# Altium PCB 400ETBV4.PcbDoc (part 2 of 2)
Units mm, origin at the board's own origin, x right, y up, seen from the top; angles counter-clockwise.
Board outline 52.77 x 58.36 mm, 2 copper layers (Top Layer, Bottom Layer), stack 1.651 mm thick; 65 components, 61 nets, 261 pads, 245 vias.
Unrouted connection lines stored in the file: 16.
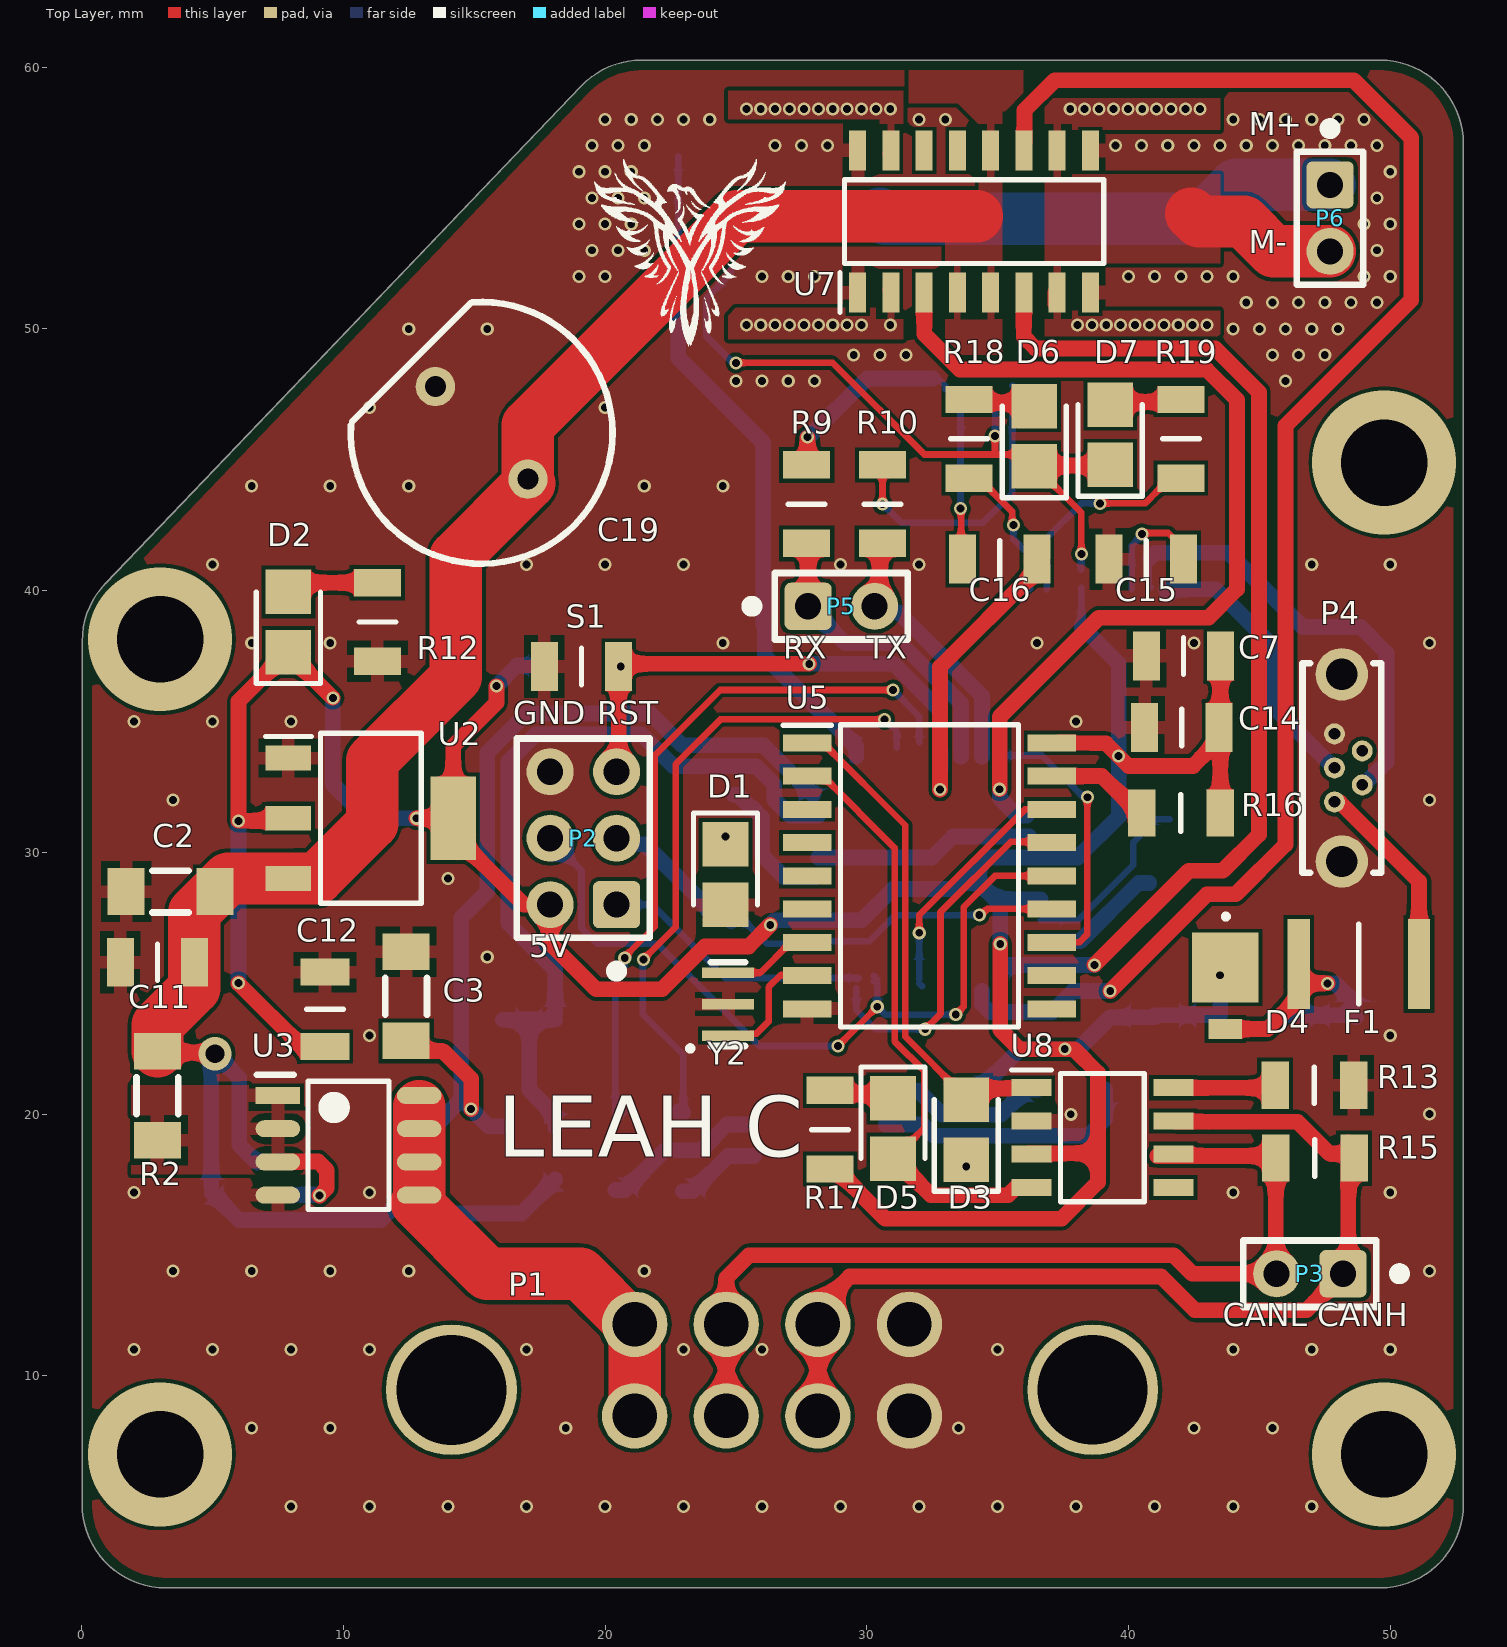
[diagram p0: Top Layer view]

## Via types
v1: diameter 0.5, hole 0.3, Top Layer to Bottom Layer, tented both sides, 240 vias
v2: diameter 5.5, hole 3.3, Top Layer to Bottom Layer, 4 vias
v3: diameter 1.27, hole 0.711, Top Layer to Bottom Layer, tented both sides, 1 vias

## Nets (pads, with @x,y where several pads share a name; then routed paths per layer and width w, separated by ;. In a path a pad name is that pad's centre, name@x,y a point inside that pad or via, vN(x,y) a via of type N, cw(c..) or ccw(c..) an arc to the next point about the centre after c; other vN are vias at no path point) (continued)
NetD5_2: (continued)
  Top Layer w0.6: D5.2@31.225,18.3 31.225,18.127 32.452,16.9 35.4,16.9 U8.4@35.7,17.2 ; U8.4@35.856,17.2 U8.4@36.1,17.2
NetD6_2: D6.2 R18.2 | length 2.7
  Top Layer w0.6: R18.2 34.025,47.175 36.375,47.175 D6.2@36.5,47.3
NetD7_2: D7.2 R19.2 | length 2.7
  Top Layer w0.6: D7.2 39.4,47.2 R19.2@42,47.2
NetF1_2: F1.2 P4.1 | length 7.6
  Top Layer w0.6: P4.1@47.904,31.902 48.082,31.902 51.1,28.885 F1.2
NetR2_1: R2.1 U1.1 U3.1 U3.2 U3.3 | length 4.1
  Top Layer w0.6: U3.3 7.516,18.186 9.042,18.186 9.373,17.856 9.373,17.17 v1(9.093,16.891)
  Bottom Layer w0.6: U1.1@8.077,16.891 8.102,16.916 9.068,16.916 v1(9.093,16.891)
NetR6_1: R6.1 U4.7 | length 6
  Bottom Layer w0.6: R6.1 20.775,17.1 22.293,18.618 23.675,18.618 24.657,19.6 U4.7@25.4,19.6
NetR7_1: R7.1 U4.6 | length 3.3
  Bottom Layer w0.6: R7.1 23.35,17.05 24.7,18.4 U4.6@25.7,18.4
NetR13_2: R13.2 U8.8 | length 3.8
  Top Layer w0.6: U8.8@41.9,21 45.695,21 R13.2@45.7,21.005
NetR16_1: R16.1 U5.17 | length 3.5
  Top Layer w0.6: U5.17@37.51,32.91 37.518,32.918 38.982,32.918 40.3,31.6 R16.1@40.5,31.6
NetR18_1: R18.1 U9.23 | length 5.4
  Top Layer w0.254: R18.1 34.275,44.3 35.553,43.022 35.553,42.547 v1(35.6,42.5)
  Bottom Layer w0.254: v1(35.6,42.5) 35.6,41.972 36.246,41.326 36.246,40.071 U9.23
NetR19_1: R19.1 U9.22 | length 7.7
  Top Layer w0.254: v1(38.913,43.332) 40.632,43.332 40.8,43.5 ; 40.852,43.527 40.852,43.552 41.6,44.3 R19.1@41.7,44.3
  Bottom Layer w0.254: U9.22 36.875,42.006 38.202,43.332 v1(38.913,43.332)
NetU5_7: U5.7 Y2.3 | length 3.4
  Top Layer w0.254: Y2.3 25.933,25.4 27.033,26.5 U5.7@27.6,26.5
NetU5_8: U5.8 Y2.1 | length 4.3
  Top Layer w0.254: Y2.1 25.5,23 25.573,23.073 25.791,23.073 26.25,23.532 26.25,24.85 26.7,25.3 U5.8@27.2,25.3
  Top Layer w0.6: U5.8@27.2,25.3 U5.8@27.3,25.3
NetU6_7: U6.7 Y1.1 | length 7
  Bottom Layer w0.254: U6.7 36.657,27.407 38.075,27.407 40.183,29.515 40.183,30.378 41.072,31.267 Y1.1@41.58,31.267
NetU6_8: U6.8 Y1.3 | length 5.1
  Bottom Layer w0.6: U6.8 38.157,26.6 40.386,28.829 Y1.3@40.792,28.829
OUT_A: P6.1 U7.2 U7.15 | length 18
  Top Layer w0.6: U7.2@30.9,51.5 30.925,51.525 U7.2 ; U7.15@30.9,56.7 U7.15@30.925,56.675
  Bottom Layer w2: 30.5,54.4 30.7,54.2 42.8,54.2 44.1,55.5 P6.1
  other v1: 25.4,50.15 25.95,50.15 26.5,50.15 27.05,50.15 27.6,50.15 28.15,50.15 28.7,50.15 29.25,50.15 29.8,50.15 30.9,50.15 25.4,58.4 25.95,58.4 26.5,58.4 27.05,58.4 27.6,58.4 28.15,58.4 28.7,58.4 29.25,58.4 29.8,58.4 30.35,58.4 30.9,58.4
OUT_B: P6.2 U7.7 U7.10 | length 6.4
  Top Layer w0.6: U7.7@37.2,50.938 U7.7@37.2,51.4
  Top Layer w2: 42.4,54.4 42.7,54.1 44.4,54.1 45.54,52.96 P6.2
  other v1: 38.05,50.15 38.6,50.15 39.15,50.15 39.7,50.15 40.25,50.15 40.8,50.15 41.35,50.15 41.9,50.15 42.45,50.15 43,50.15 37.775,58.4 38.325,58.4 38.875,58.4 39.425,58.4 39.975,58.4 40.525,58.4 41.075,58.4 41.625,58.4 42.175,58.4 42.725,58.4
RESET: C16.2 P2.3 R8.2 S1.1 U6.29 | length 30.9
  Top Layer w0.6: P2.3@20.3,33.3 20.369,33.3 P2.3@20.52,33.451 ; P2.3 20.52,33.16 P2.3@20.52,33.451 ; S1.1 S1.1@20.52,37.02 ; v1(27.8,37.2) 20.7,37.2 S1.1@20.52,37.02 ; v1(32.8,32.4) 32.8,37.08 36.4,40.68 C16.2@36.4,41.2 ; P2.3@20.52,33.451 S1.1@20.52,37.02
  Bottom Layer w0.6: v1(20.6,37.1) R8.2@20.7,37.2 ; v1(27.8,37.2) 30.586,37.2 31.024,37.2 32.8,35.424 U6.29@32.8,33.869 ; v1(32.8,32.4) U6.29@32.817,33.858
RXD: R9.2 U9.1 | length 8
  Top Layer w0.6: R9.2 28.075,44.8 27.737,45.138 v1@27.737,45.837
  Bottom Layer w0.254: 32.525,48.1 32.725,48.1 33,47.825 U9.1@33,47.7
  Bottom Layer w0.6: v1(27.737,45.872) 27.788,45.872 30.015,48.1 32.525,48.1
TXD: R10.2 U9.5 | length 10.5
  Top Layer w0.254: v1(30.6,43.3) R10.2
  Bottom Layer w0.254: v1@30.757,43.157 31.318,42.596 34.442,42.596 35.56,43.713 35.56,47.135 U9.5 ; U9.5@35.569,47.831 U9.5@35.6,47.8
USBD+: P4.3 U9.15 | length 11
  Bottom Layer w0.254: U9.15@41.425,39.652 U9.15
  Bottom Layer w0.6: U9.15 43.338,40.05 45.593,37.795 45.593,35.484 47.814,33.263 47.843,33.263 P4.3@47.879,33.299
USBD-: P4.2 U9.16 | length 17.3
  Bottom Layer w0.254: 40.775,41.175 U9.16 U9.16@40.848,40.123
  Bottom Layer w0.6: 40.834,41.266 41.018,41.45 43.815,41.45 46.657,38.608 48.87,38.608 49.86,37.617 49.86,33.452 49.447,33.038 ; P4.2@48.971,32.588 48.997,32.588 49.447,33.038
VBATT: P1.1 P1.5 U3.5 U3.6 U3.7 U3.8 | length 17.2
  Top Layer w2: U3.5@12.8,16.6 15.5,13.9 19.061,13.9 20.996,11.965 P1.1 P1.5 ; U3.5 U3.6 U3.7 12.9,20.3
VUSB: C17.2 C18.2 D4.1 F1.1 | length 9.5
  Top Layer w0.6: D4.1@43.749,23.2 D4.1 45.309,23.249 46.5,24.44 F1.1@46.5,24.8 ; F1.1@46.6,25 v1@47.6,25
  Bottom Layer w0.6: C17.2 45.99,23.774 48.174,23.774 C18.2@48.18,23.78 ; v1(47.6,24.994) 47.904,24.994 48.649,24.249 C18.2@48.18,23.78 ; C18.2@48.7,23.7 48.62,23.78 C18.2 C18.2@48.18,23.78
pads on no net: P1.24 P4.4 U1.7 U4.3 U4.5 U4.8 U5.3 U5.4 U5.5 U5.6 U5.10 U5.11 U7.13 U7.14 U8.5 U9.3 U9.6 U9.8 U9.9 U9.10 U9.11 U9.12 U9.13 U9.14 U9.19 U9.24 U9.27 U9.28
copper on no net:
  other v2: 3,7 49.77,7 3,38.14 49.77,44.89

## Polygon pours and split planes (outlines as drawn)
GND on Top Layer "GND_L01_P066" (solid, pour order 66): 3.205,1.9 cw(c3.205,5.08) 0.025,5.08 0.025,38.066 cw(c3.205,38.066) 0.907,40.264 19.093,59.281 cw(c21.391,57.083) 21.391,60.263 49.616,60.263 cw(c49.616,57.083) 52.796,57.083 52.796,5.08 cw(c49.616,5.08) 49.616,1.9
OUT_A on Top Layer "Top Layer-OUT_A" (solid, pour order 54): 30.6,52.2 31.4,52.2 31.4,49.6 24.7,49.6 24.7,50.5 25,50.8 30.6,50.8
OUT_A on Top Layer "Top Layer-OUT_A 1" (solid, pour order 52): 24.7,59.1 31.4,59.1 31.4,56 30.5,56 30.5,58 24.7,58
+12V on Top Layer "Top Layer-+12V" (solid, pour order 51): 31.6,60.012 35.985,60.012 35.985,59.012 35.285,58.312 35.185,58.312 35.185,50.312 35.185,49.012 33,49.012 33,54.027 34.285,55.312 34.285,57.812 33.485,58.612 31.6,58.612
OUT_B on Top Layer "Bottom Layer-OUT_B1" (solid, pour order 49): 36.8,58.8 43.5,58.8 43.5,57.6 37.6,57.6 37.6,55.8 37.7,55.9 43.5,55.9 43.5,52.5 37.7,52.5 37.7,50.7 43.5,50.7 43.5,49.6 36.8,49.6
NetR2_1 on Top Layer "Top Layer-NetR2_1" (solid, pour order 25): 8.5,21.2 8.6,21.1 8.6,17.7 4.6,17.7 1.9,17.7 1.9,18.3 1.9,19.8 1.9,21.1 6.1,21.1
GND on Bottom Layer "GND_L02_P057" (solid, pour order 57): 3.205,1.9 cw(c3.205,5.08) 0.025,5.08 0.025,38.066 cw(c3.205,38.066) 0.907,40.264 19.093,59.281 cw(c21.391,57.083) 21.391,60.263 49.616,60.263 cw(c49.616,57.083) 52.796,57.083 52.796,5.08 cw(c49.616,5.08) 49.616,1.9
OUT_A on Bottom Layer "Bottom Layer-OUT_B" (solid, pour order 47): 31.4,49.6 24.7,49.6 24.7,50.8 30.6,50.8 30.6,52.9 30.5,52.8 26.314,52.8 26.314,56.2 30.5,56.2 30.5,58 24.7,58 24.7,59.1 31.4,59.1
OUT_B on Bottom Layer "Bottom Layer-OUT_B 1" (solid, pour order 56): 36.9,52.2 37.7,52.2 37.7,50.8 43.5,50.8 43.5,49.7 36.9,49.7
OUT_B on Bottom Layer "Bottom Layer-No Net" (solid, pour order 55): 36.9,56 36.9,58.5 37.2,58.8 43.5,58.8 43.5,57.6 37.7,57.6 37.7,56

## Silkscreen, mask and mechanical layers (free items; w line width, h text height)
Top Overlay:
  drawing of 3058 lines, arcs and shapes, not listed
  text "M+ /  /  / M-" at 44.6,52.6 h1.5
  text "RX    TX" at 26.8,37.1 h1.5
  text "GND" at 16.5,34.6 h1.5
  text "RST" at 19.7,34.6 h1.5
  text "5V" at 17.1,25.7 h1.5
  text "LEAH C" at 15.9,17.6 h4
  text "CANL CANH" at 43.6,11.6 h1.5
Bottom Overlay:
  drawing of 14 lines, arcs and shapes, not listed
  text "Purple ETB V2.0" at 40.7,50.7 h1.5
Mechanical 1:
  lines w0.05: 0.907,40.264 ccw(c3.205,38.066) 0.025,38.066 0.025,5.08 ccw(c3.205,5.08) 3.205,1.9 49.616,1.9 ccw(c49.616,5.08) 52.796,5.08 ; 0.907,40.264 19.093,59.281 cw(c21.391,57.083) 21.391,60.263 49.616,60.263 cw(c49.616,57.083) 52.796,57.083 ; 0.907,40.264 0.907,40.264 ; 52.796,5.08 52.796,5.08 ; 52.796,5.08 52.796,57.083 ; 52.796,57.083 52.796,57.083